# Altium PCB PCB_mounting.PcbDoc (part 2 of 4)
Units mm, origin at the board's own origin, x right, y up, seen from the top; angles counter-clockwise.
Board outline 75 x 100 mm, 4 copper layers (Top Layer, Int1 (GND), Int2 (PWR), Bottom Layer), stack 1.586 mm thick; 145 components, 97 nets, 660 pads, 380 vias.
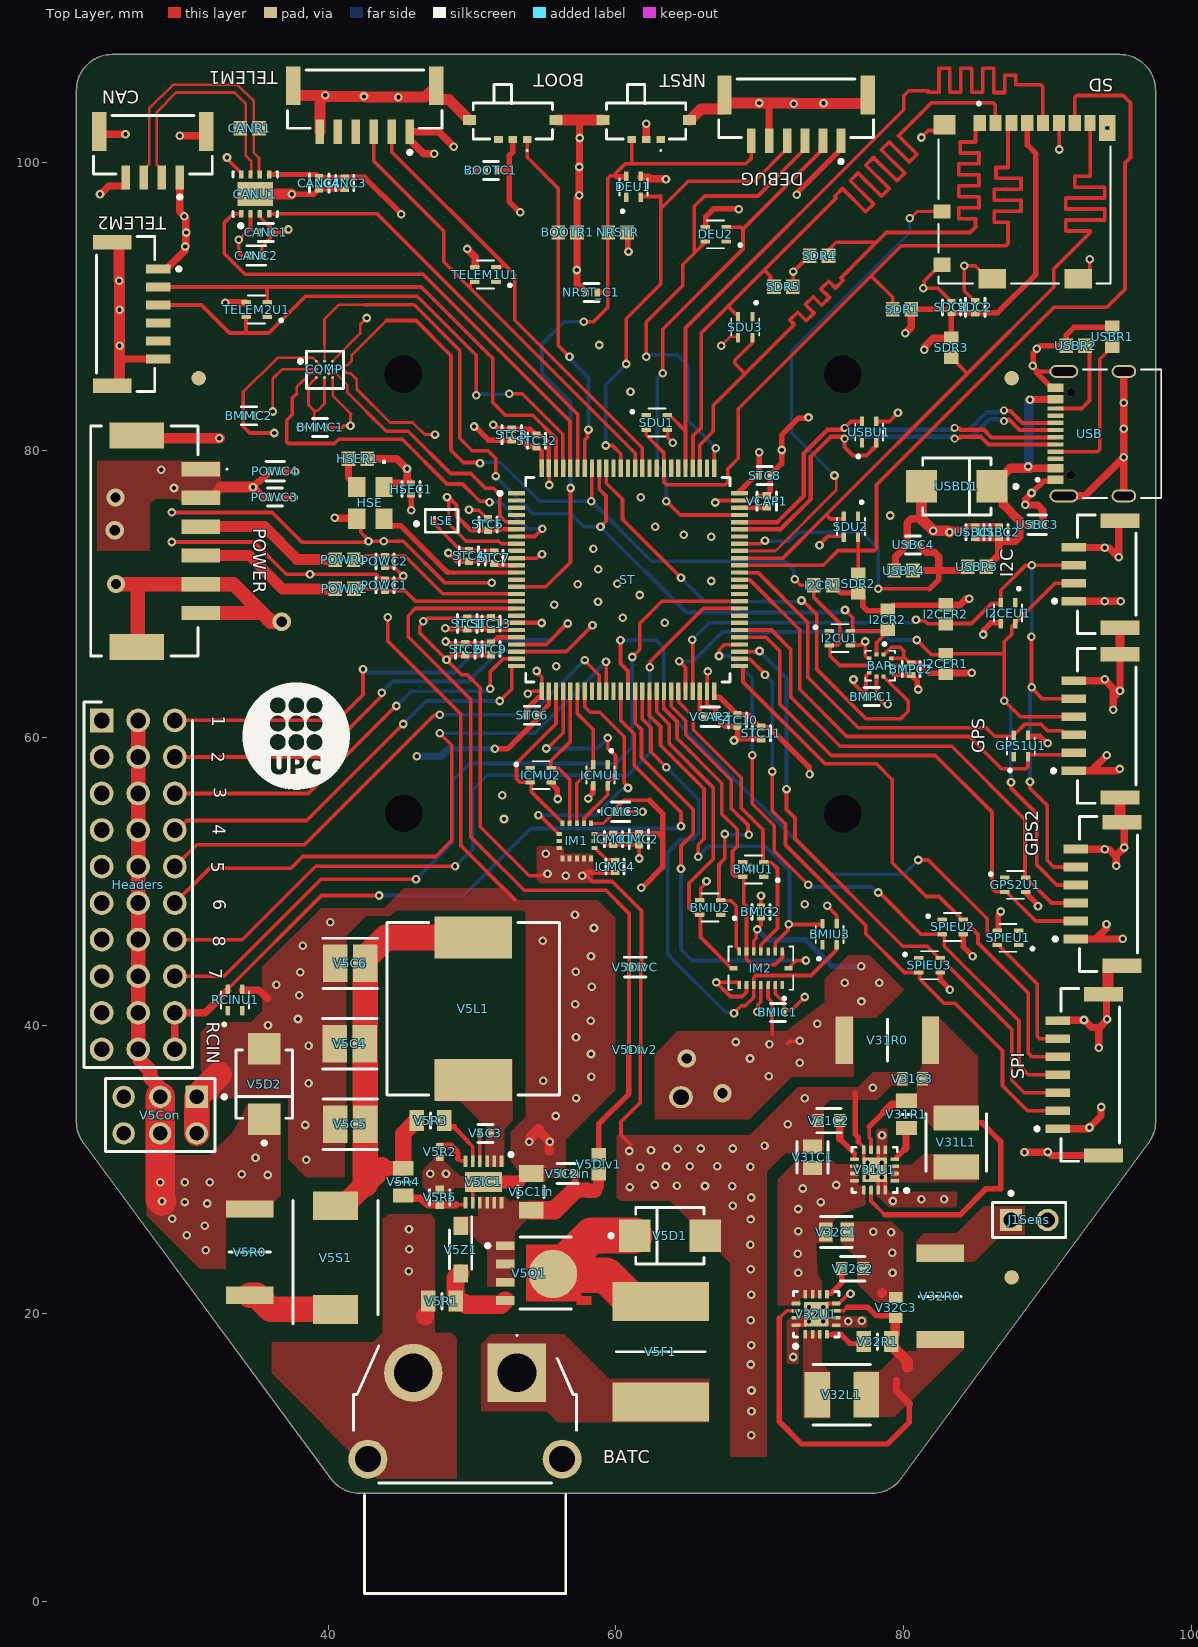
[diagram p0: Top Layer view]

## Part data (continued)
V5R1 V5R3 V5R4 V31R1 V32R1: library part 0805W8F1003T5E, "Resistor", Manufacturer_Name=ROYALOHM, Mouser Part Number=303-0805W8F1003T5E, Datasheet Link=https://www.mouser.in/datasheet/2/1365/1-3044649.pdf, Height=0.65mm, Manufacturer_Part_Number=0805W8F1003T5E, Mouser Price/Stock=https://www.mouser.co.uk/ProductDetail/Royalohm/0805W8F1003T5E?qs=e8oIoAS2J1ShnA7x9P0k6g%3D%3D
V5R5: library part CMP-2002-08240-2, "RES Thick Film, 16.9kΩ, 1%, 0.063W, 100ppm/°C, 0402", Case Code (Imperial)=0402, Case Code (Metric)=1005, Max Operating Temperature=155°C, Max Power Dissipation=63mW, Min Operating Temperature=-55°C, Package Quantity=10, Resistance=16.9kR, Temperature Coefficient=100ppm/°C, Tolerance=1%, Voltage Rating=50V, Case/Package=0402, Composition="Thick Film", Contact Plating=Tin, Depth=0.5mm, Features="Automotive AEC-Q200", Height=0.016inch, Length=1mm, Military Standard=Not, Number of Pins=2, Number of Terminations=2, Packaging="Tape and Reel", Power Rating=63mW, Radiation Hardening=No, Termination=SMD/SMT, Weight=2.3E-05oz, Width=0.02inch
V5S1: "Schottky Diode", Manufacturer_Name=MDD, Datasheet Link=https://4donline.ihs.com/images/VipMasterIC/IC/DCNG/DCNGS00334/DCNGS00429-1.pdf?hkey=EF798316E3902B6ED9A73243A3159BB0, Height=2.62mm, Manufacturer_Part_Number=SS34C
V5Z1: "Zener Diode", Manufacturer_Name=Vishay, Mouser Part Number=78-BZT52C15-E3-08, Arrow Part Number=BZT52C15-E3-08, Arrow Price/Stock=https://www.arrow.com/en/products/bzt52c15-e3-08/vishay?utm_currency=USD&region=nac, Datasheet Link=https://www.vishay.com/docs/85760/bzt52.pdf, Height=1.35mm, Manufacturer_Part_Number=BZT52C15-E3-08, Mouser Price/Stock=https://www.mouser.co.uk/ProductDetail/Vishay-Semiconductors/BZT52C15-E3-08?qs=KP8Io%2FXyE5T2xU7%252Bcte76g%3D%3D
V31C1 V32C1: library part CMP-2007-03243-2, "CAP CER 10UF 10V X5R 0805", 3DS Part Number=220-00001, Capacitance=10uF, Manufacturer=Kemet, Manufacturer Part Number=C0805C106K8PACTU, Package=C0805C-DG, Temperature="-55°C to +85°C", Temperature Characteristic=X5R, Temperature Coefficient=15%, Temperature Range High=+85°C, Temperature Range Low=-55°C, Tolerance=10%, Voltage=10V, Automotive=No, Category=Cap, ComponentLink2Description=Datasheet, ComponentLink2URL=https://content.kemet.com/datasheets/KEM_C1006_X5R_SMD.pdf, Device Class L1="Passive Components", Device Class L2=Capacitors, Device Class L3="Ceramic Capacitors", Digikey Description="CAP CER 10UF 10V X5R 0805", Height=1.4mm, Ipc Land Pattern Name=CAPC200125X125, Lead Free=Yes, Material=Ceramic, Mouser Description="CAP CER 10UF 10V X5R 0805", Octopart=https://octopart.com/c0805c106k8pactu-kemet-98697, RoHS=TRUE, Voltage Rating=10V
V31C2 V32C2: library part CMP-03422-000674-1, "CAP CER 390PF 50V X7R 0603", Capacitance="390 pF", Manufacturer=YAGEO, Manufacturer Part Number=CC0603KRX7R9BB391, Package=CC0603-DA, Temperature="-55°C to +125°C", Temperature Characteristic=X7R, Temperature Coefficient=15%, Temperature Range High=+125°C, Temperature Range Low=-55°C, Tolerance=0.1, Voltage="50 V", Automotive=No, Category=Cap, ComponentLink2Description=Datasheet, ComponentLink2URL=http://www.yageo.com/documents/recent/UPY-GPHC_X7R_6.3V-to-50V_18.pdf, Device Class L1="Passive Components", Device Class L2=Capacitors, Device Class L3="Ceramic Capacitors", Digikey Description="CAP CER 390PF 50V X7R 0603", Footprint Url=http://www.yageo.com/exep/pages/download/literatures/UPY-C_GEN_24.pdf, Height=0.9mm, Lead Free=Yes, Material=Ceramic, Mouser Description="0603 390 pF 50 V ±10 % Tolerance X7R SMT Multilayer Ceramic Capacitor", Octopart=https://octopart.com/cc0603krx7r9bb391-yageo-39467837, RoHS=TRUE, Voltage Rating="50 V"
V31C3 V32C3: library part GRM188R60J226MEA0D, "Capacitor", Manufacturer_Name="Murata Electronics", Mouser Part Number=81-GRM188R60J226ME0D, Arrow Part Number=GRM188R60J226MEA0D, Arrow Price/Stock=https://www.arrow.com/en/products/grm188r60j226mea0d/murata-manufacturing?utm_currency=USD&region=nac, Datasheet Link=https://search.murata.co.jp/Ceramy/image/img/A01X/G101/ENG/GRM188R60J226MEA0-01A.pdf, Height=0.9mm, Manufacturer_Part_Number=GRM188R60J226MEA0D, Mouser Price/Stock=https://www.mouser.co.uk/ProductDetail/Murata-Electronics/GRM188R60J226MEA0D?qs=p%2FZgMVRdWRkAKoLX3oNjgw%3D%3D
V31L1 V32L1: library part PA4332.222NLT, "Inductor", Manufacturer_Name=PULSE, Mouser Part Number=673-PA4332222NLT, Arrow Part Number=PA4332.222NLT, Arrow Price/Stock=https://www.arrow.com/en/products/pa4332.222nlt/pulse-electronics-corporation?utm_currency=USD&region=nac, Datasheet Link=https://datasheet.datasheetarchive.com/originals/distributors/DKDS-10/182650.pdf, Height=2mm, Manufacturer_Part_Number=PA4332.222NLT, Mouser Price/Stock=https://www.mouser.co.uk/ProductDetail/Pulse-Electronics/PA4332.222NLT?qs=%2FzQKu7YvIMbE5ttuY4d%2Fzg%3D%3D
V31U1 V32U1: library part CMP-0323-00127-3, "Buck Step Down Regulator with 3 to 17 V Input and 3.3 V Output, -40 to 85 degC, 16-Pin QFN (RGT), Green (RoHS & no Sb/Br)", Manufacturer="Texas Instruments", Rating=Catalog, Switch Current Limit(Typ)(A)=3, Code_JEDEC=MO-220, ComponentLink1Description=Datasheet, ComponentLink1URL=http://www.ti.com/general/docs/lit/getliterature.tsp?genericPartNumber=TPS62142&fileType=pdf, ComponentLink2Description="Package Specification", ComponentLink2URL=http://www.ti.com/litv/pdf/mpqf119g, ComponentLink3Description="URL Link1", ComponentLink3URL="Samples URL:http://www.ti.com/product/tps54611#samples", DatasheetVersion=SLVSAJ0, Duty Cycle(Max)(%)=100, Eco-Plan="Green (RoHS & no Sb/Br)", Iout(Max)(A)=2, Iq(Typ)(mA)=0.017, Mounting Technology="Surface Mount", PackageDescription="16-Pin Plastic Quad Flat No-Lead, 3 x 3 mm Body, 0.5 mm Pitch, 1.7 x 1.7 mm Exposed Pad", PackageReference=RGT0016C, PackageVersion="revH, Oct-2011", PartNumber=TPS62142RGTT, Preset Vout(V)=3.3, Regulated Outputs(#)=1, SubFamily="Step-Down Regulator", Synchronous Rectification=TRUE, Topology=Buck, Vin(Max)(V)=17, Vin(Min)(V)=3, Vout(Max)(V)=3.3, Vout(Min)(V)=3.3

## Free pads (board coordinates)
  oval 1.65x1.524 hole 1.1: 8(64.516,35.027)
  round 1 all layers, no hole paste-1 mask+0.5: FD1(31,85) FD2(87.5,85) FD3(87.5,22.5)
  round 1.524 hole 2.6 paste-2539.97: MH(45.229,85.268) MH(45.255,54.762) MH(75.76,54.737) MH(75.76,85.268)

## Via types
v1: diameter 0.6, hole 0.3, Top Layer to Bottom Layer, 358 vias
v2: diameter 0.5, hole 0.3, Top Layer to Bottom Layer, 10 vias
v3: diameter 1.27, hole 0.711, Top Layer to Bottom Layer, 6 vias
v4: diameter 0.55, hole 0.3, Top Layer to Bottom Layer, 6 vias